# EAGLE board Photon_Dimensioned (EAGLE 7.6.0)

Size 101.6 x 76.2 mm. Coordinates in mm from the lower left corner, seen from the top.
Copper layers (1*16): Top 0.035mm / dielectric 1.5mm / Bottom 0.035mm
Design rules "default": minimum track width 10mil, minimum drill 24mil, track to track 8mil, track to pad 8mil, pad to pad 8mil, via to via 8mil, smd to smd 8mil, copper to edge 40mil, drill to drill 8mil, minimum pad ring 10mil, minimum via ring 8mil, stop-mask expansion 4mil, vias tented up to drill 0mil, thermal gap 10mil
Holes 1 mm at 3.5,3.5 98.1,72.7

## Footprints (pad centres in the part's own frame; a part is rotated, then mirrored left to right if it is on the bottom)
PHOTON_RAW = smd 1 x 2 bottom: 3V3 35.56,49.13; A0 63.5,27.07; A1 60.96,27.07; A2 58.42,27.07; A3 55.88,27.07; A4 53.34,27.07; A5 50.8,27.07; D0 63.5,49.13; D1 60.96,49.13; D2 58.42,49.13; D3 55.88,49.13; D4 53.34,49.13; D5 50.8,49.13; D6 48.26,49.13; D7 45.72,49.13; DAC 48.26,27.07; GND 38.1,27.07; GND@1 43.18,49.13; RST 38.1,49.13; RX 43.18,27.07; TX 40.64,27.07; VBAT 40.64,49.13; VIN 35.56,27.07; WKP 45.72,27.07 | drill 1: 3V3. 35.56,46.99; A0. 63.5,29.21; A1. 60.96,29.21; A2. 58.42,29.21; A3. 55.88,29.21; A4. 53.34,29.21; A5. 50.8,29.21; D0. 63.5,46.99; D1. 60.96,46.99; D2. 58.42,46.99; D3. 55.88,46.99; D4. 53.34,46.99; D5. 50.8,46.99; D6. 48.26,46.99; D7. 45.72,46.99; DAC. 48.26,29.21; GND. 38.1,29.21; GND.@1 43.18,46.99; RST. 38.1,46.99; RX. 43.18,29.21; TX. 40.64,29.21; VBAT. 40.64,46.99; VIN. 35.56,29.21; WKP. 45.72,29.21 | smd 1 x 2: 3V31 35.56,49.13; A0@1 63.5,27.07; A1@1 60.96,27.07; A2@1 58.42,27.07; A3@1 55.88,27.07; A4@1 53.34,27.07; A5@1 50.8,27.07; D0@1 63.5,49.13; D1@1 60.96,49.13; D2@1 58.42,49.13; D3@1 55.88,49.13; D4@1 53.34,49.13; D5@1 50.8,49.13; D6@1 48.26,49.13; D7@1 45.72,49.13; DAC1 48.26,27.07; GND1 38.1,27.07; GND@2 43.18,49.13; RST1 38.1,49.13; RX1 43.18,27.07; TX1 40.64,27.07; VBAT1 40.64,49.13; VIN1 35.56,27.07; WKP1 45.72,27.07 | drill 0.3 pad 1: P$1 3.5,3.5; P$2 98.1,72.7

## Placement (x,y rotation side)
E$1  [PHOTON_RAW]  0,0 0 top

## Library data of the parts
E$1 = voltera_community_lib

## Text on the board
Name: Dimensions in Inches, unless otherwise specified